# Altium PCB Boost2.PcbDoc
Units mil, origin at the board's own origin, x right, y up, seen from the top; angles counter-clockwise.
Board outline 5000 x 4000 mil, 2 copper layers (Top Layer, Bottom Layer); 25 components, 166 nets, 94 pads, 0 vias.
Unrouted connection lines stored in the file: 72.
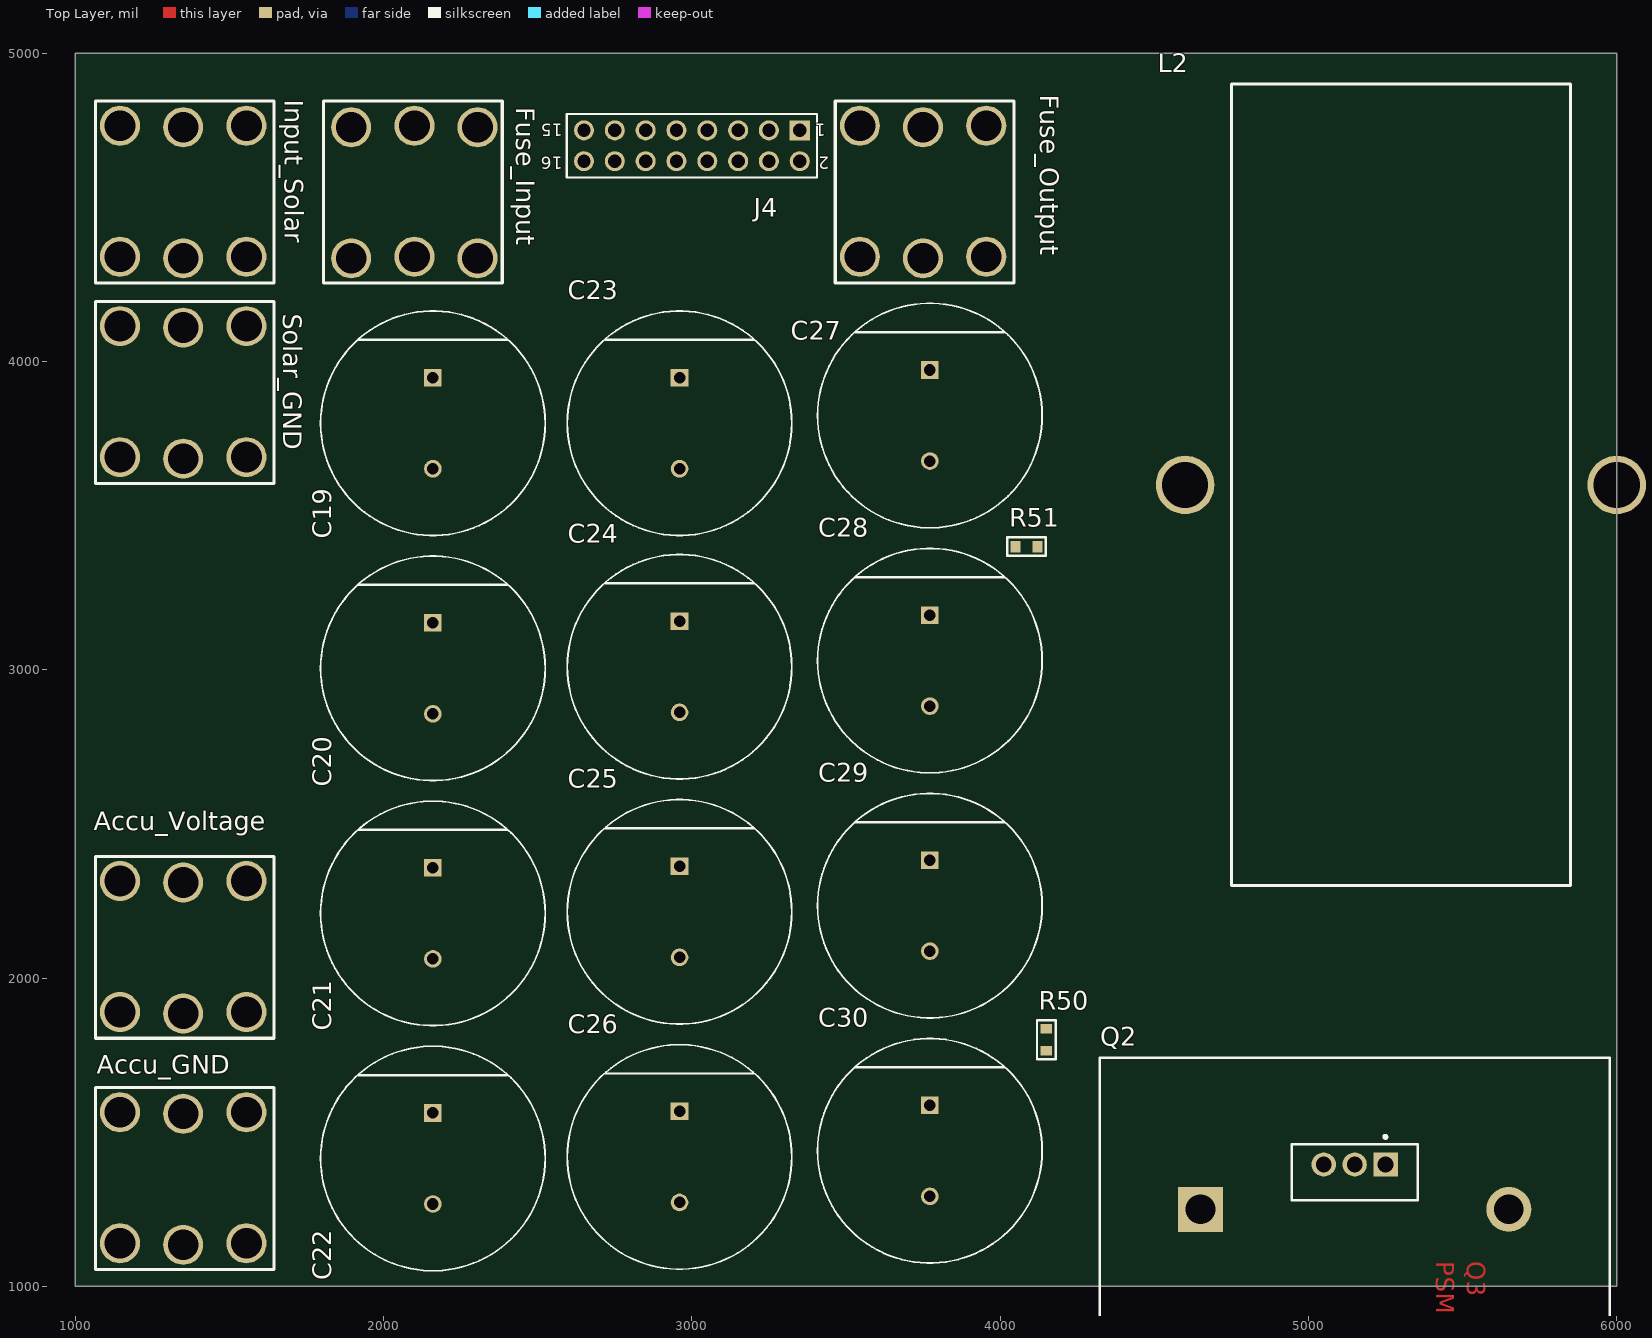
[diagram p0: Top Layer view]
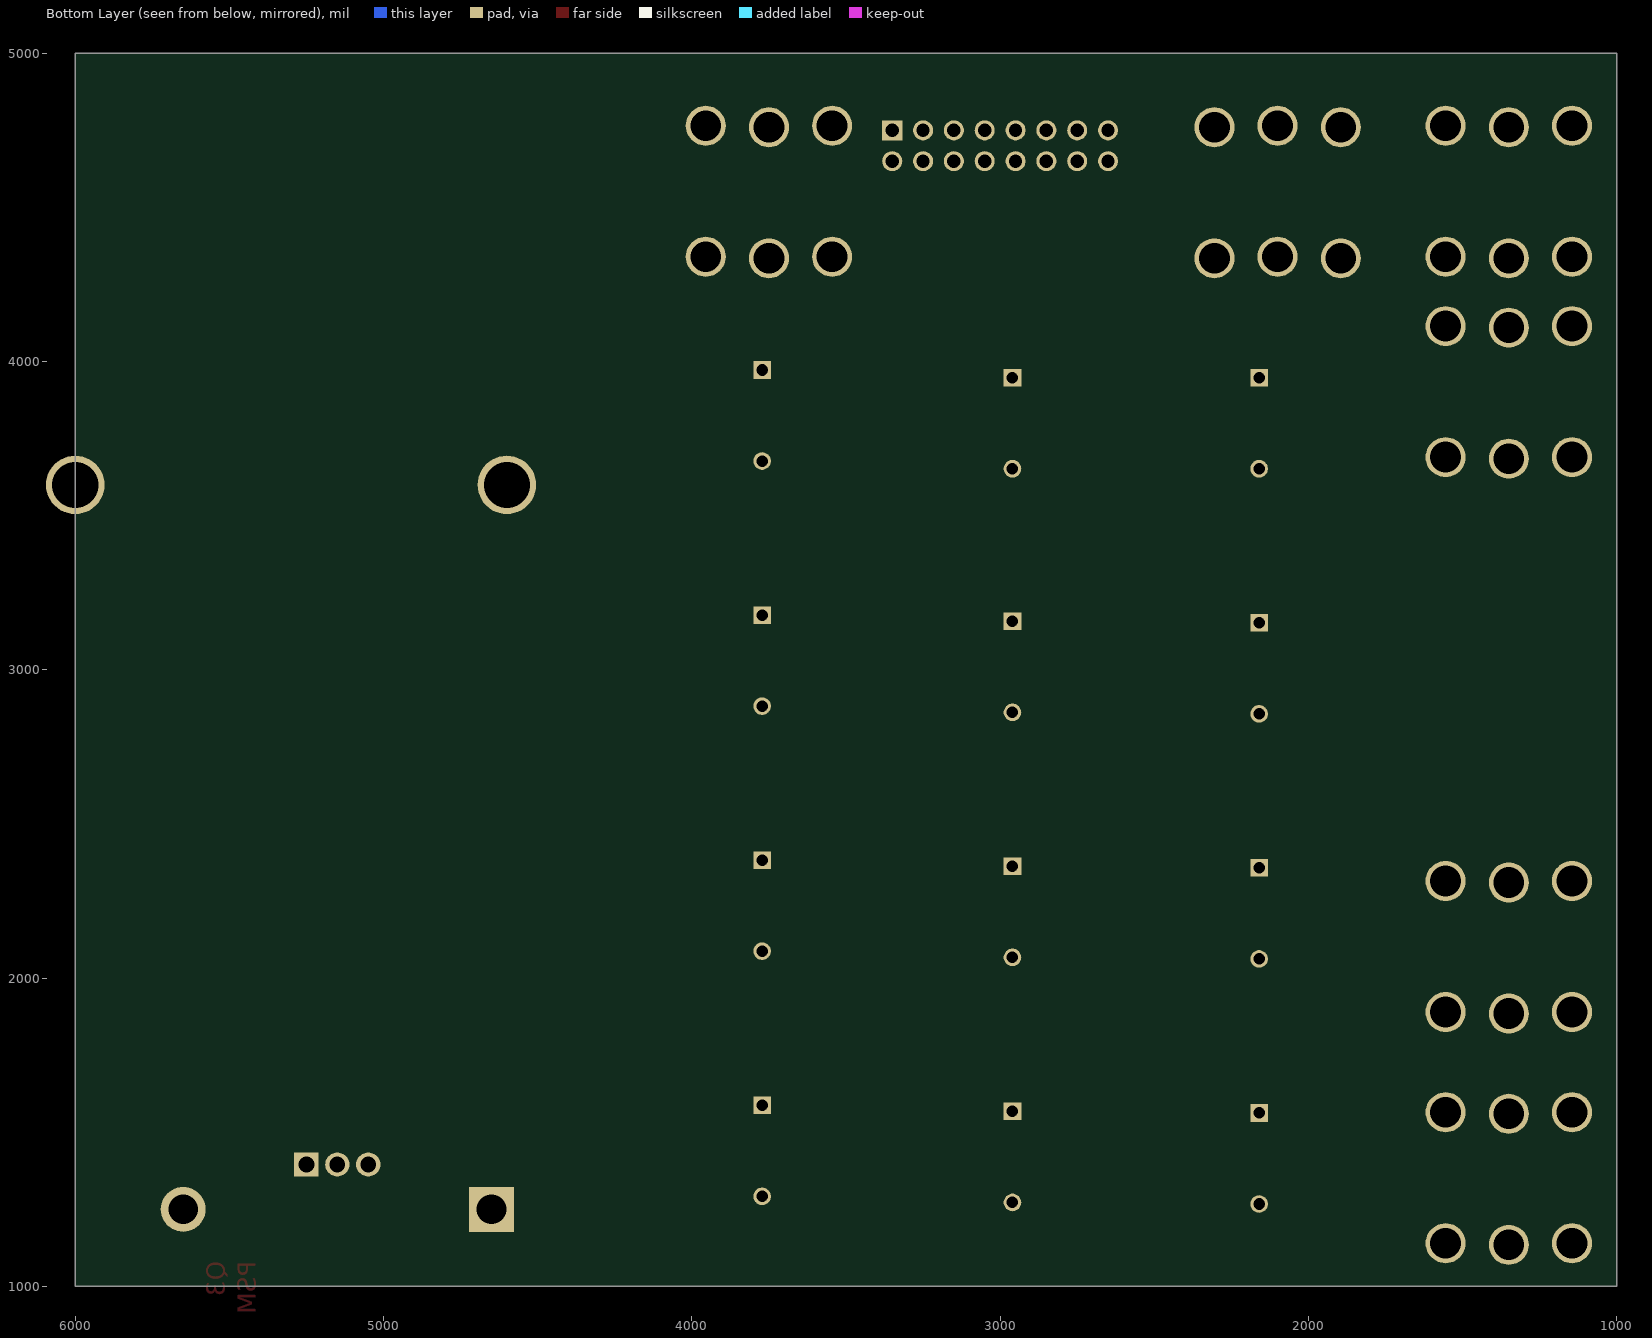
[diagram p1: Bottom Layer view, seen from below]

## Layer stack, top to bottom
Top Solder: solder mask 0.4, Solder Resist, Dk 3.5
Top Layer: signal copper 1.4
Dielectric 1: dielectric 12.6, FR-4, Dk 4.8
Bottom Layer: signal copper 1.4
Bottom Solder: solder mask 0.4, Solder Resist, Dk 3.5

## Board outline
1000,1000 6000,1000 6000,5000 1000,5000

## Design rules (kind name [scope] priority, off if disabled: settings)
Clearance [All] p1: gap=10 ignorepadtopadclearanceinfootprint=FALSE except(0: Arc-Hole Track-Hole SMDPad-Hole THPad-Hole Via-Hole Fill-Hole Poly-Hole Region-Hole Text-Hole)
PolygonConnect [All] p1: connectstyle=Relief reliefconductorwidth=10 reliefentries=4 polygonreliefangle="90 Angle" airgapwidth=10
RoomDefinition BoostConverter [InComponentClass('BoostConverter')] p1: confinementstyle=ConfineIn formatcopy=TRUE lockcomponents=FALSE outline 7045,1060 27110,1060 27110,3790 7045,3790
RoutingVias [All] p1: holewidth=28 width=50 viastyle="Through Hole" minholewidth=28 minwidth=50 maxholewidth=28 maxwidth=50
SolderMaskExpansion [All] p1: expansion=4 istentingtop=FALSE
Width [All] p1: maxlimit=10 minlimit=10 preferedwidth=10
30 further rules are at their usual default settings.

## Classes and differential pairs
component class BoostConverter: F1

## Components (designator, comment, footprint, x,y, rotation, side; value= is the part's Value field where it differs from the comment)
Accu_GND "Terminal_PCB" Terminal_PCB_7798 1350,1350 r90 top (schematic designator Accumulator_GND)
Accu_Voltage "Terminal_PCB" Terminal_PCB_7798 1350,2100 r90 top (schematic designator Accumulator_Voltage)
C19 "330 uF" FP-LXW18X25-MFG 2160,3800 r270 top
C20 "330 uF" FP-LXW18X25-MFG 2160,3005 r270 top
C21 "330 uF" FP-LXW18X25-MFG 2160,2210 r270 top
C22 "330 uF" FP-LXW18X25-MFG 2160,1415 r270 top
C23 "330 uF" FP-LXW18X25-MFG 2960,3800 r270 top
C24 "330 uF" FP-LXW18X25-MFG 2960,3010 r270 top
C25 "330 uF" FP-LXW18X25-MFG 2960,2215 r270 top
C26 "330 uF" FP-LXW18X25-MFG 2960,1420 r270 top
C27 "330 uF" FP-LXW18X25-MFG 3772.05,3825 r270 top
C28 "330 uF" FP-LXW18X25-MFG 3772.05,3030 r270 top
C29 "330 uF" FP-LXW18X25-MFG 3772.05,2235 r270 top
C30 "330 uF" FP-LXW18X25-MFG 3772.05,1440 r270 top
C44 "CAP_AC_68uF" Capacitor_AC_68_uF -99999,99999 r90 top
Fuse_Input "Terminal_PCB" Terminal_PCB_7798 2100,4550 r270 top
Fuse_Output "Terminal_PCB" Terminal_PCB_7798 3750,4550 r90 top
Input_Solar "Terminal_PCB" Terminal_PCB_7798 1350,4550 r90 top (schematic designator Input_Connector)
J4 "61301621121" 61301621121 3000,4700 r180 top
L2 "Coil" Tekercs_E65_FERRITE 5300,3600 r0 top value="50 uH"
Q2 "PSMN8R5-100PS" FP-TO-220AB-MFG 5150,1370 r270 top
Q3 "PSMN8R5-100PS" FP-TO-220AB-MFG 6930,834.65 r0 top
R50 "3.3K" FP_0603_RES 4150,1800 r90 top
R51 "3.3K" FP_0603_RES 4085.43,3400 r0 top
Solar_GND "Terminal_PCB" Terminal_PCB_7798 1350,3900 r90 top (schematic designator Input_Connector_GND)

## Footprints (in the part's own frame and the unit in brackets; to place one, negate y for a bottom-side part, rotate by r counter-clockwise, add the part's x,y. Pads: shape width x height; smd on the part's side, far side on the other; paste and mask are expansions set on the pad)
61301621121 [mm] "Pin Header, pitch 2.54 mm, THT, Vertical, dual row, 16p"
  rect 1.65x1.65 hole 1.1: 1(-8.89,-1.27)
  round 1.65 hole 1.1: 2(-8.89,1.27) 3(-6.35,-1.27) 4(-6.35,1.27) 5(-3.81,-1.27) 6(-3.81,1.27) 7(-1.27,-1.27) 8(-1.27,1.27) 9(1.27,-1.27) 10(1.27,1.27) 11(3.81,-1.27) 12(3.81,1.27) 13(6.35,-1.27) 14(6.35,1.27) 15(8.89,-1.27) 16(8.89,1.27)
  silkscreen extent -10.31,-2.62 10.31,2.62, body extent -10.16,-2.54 10.16,2.54, height 8.59
Capacitor_AC_68_uF [mil]
  round 55 hole 35: 1(-120503.27,-120503.27) 2(-119418.27,-120503.27)
  silkscreen extent -120581,-120933 -119341,-120073
FP-LXW18X25-MFG [mm]
  rect 1.45x1.45 hole 0.95 paste-1000 mask+0: 1(-3.75,0)
  round 1.45 hole 0.95 paste-1000 mask+0: 2(3.75,0)
  silkscreen extent -9.25,-9.25 9.25,9.25, body extent -9.35,-9.35 9.35,9.35, height 0.25
FP-TO-220AB-MFG [mm]
  rect 2x2 hole 1.3 paste-1000 mask+0: 1(-0.647,2.55)
  rect 3.7x3.7 hole 2.45 paste-1000 mask+0: 1(3.048,-12.7)
  round 2 hole 1.3 paste-1000 mask+0: 2(-0.647,0) 3(-0.647,-2.55)
  round 3.7 hole 2.45 paste-1000 mask+0: 2(3.048,12.7)
  Top Layer region: 12.816,-13.418 12.816,-13.418 12.816,-13.418 12.816,-13.418
  Top Layer region: 12.816,-13.418 12.816,-13.418 12.816,-13.418 12.816,-13.418
  Top Layer region: 12.816,-13.418 12.816,-13.418 12.816,-13.418 12.816,-13.418
  silkscreen extent -9.45,-21 15.55,21, body extent -9.55,-21.1 15.65,21.1, height 0.25
FP_0603_RES [mm] "0603 ellenállás"
  rect 0.8x0.95 smd: 1(-0.9,0) 2(0.9,0)
  silkscreen extent -1.6,-0.77 1.6,0.77, body extent -0.8,-0.4 0.8,0.4, height 0.44
Tekercs_E65_FERRITE [mil]
  round 190 hole 150: 1(-700,0) 2(700,0)
  silkscreen extent -550,-1300 550,1300
Terminal_PCB_7798 [mil]
  round 130 hole 100: 1(-215,0) 1(-210,-205) 1(-210,205) 1(210,0) 1(215,-205) 1(215,205)
  silkscreen extent -295,-295 295,285

## Part data
C19 C20 C21 C22 C23 C24 C25 C26 C27 C28 C29 C30: library part CMP-35376-000008-1, "CAP ALUM 47UF 20% 500V THRUHOLE / 500LXW47MEFR18X25"
C44: "Cap Film 68uF 100V PET 10% (31.5 X 22 X 36.5mm) Radial 27.5mm 125C Bulk", Capacitance=68uF, Case/Package=Radial, Dielectric=PET, Dielectric Material=Polyester, Manufacturer="TDK EPCOS", Manufacturer Part Number=B32524Q1686K000, Max Operating Temperature=125°C, Min Operating Temperature=-55°C, Tolerance=10%, Voltage Rating=100V, Category="Film Capacitors", ComponentLink1Description=http://www.farnell.com/datasheets/1955213.pdf?src-supplier=Farnell, ComponentLink1URL=http://www.farnell.com/datasheets/1955213.pdf?src-supplier=Farnell, ComponentLink2Description=http://components.arrow.com/part/dataview/0323_01924821?src-supplier=Arrow+Europe, ComponentLink2URL=http://components.arrow.com/part/dataview/0323_01924821?src-supplier=Arrow+Europe, ComponentLink3Description=https://www.tdk-electronics.tdk.com/inf/20/20/db/fc_2009/B32520_529.pdf?src-supplier=Digi-Key, ComponentLink3URL=https://www.tdk-electronics.tdk.com/inf/20/20/db/fc_2009/B32520_529.pdf?src-supplier=Digi-Key, ComponentLink4Description=http://www.farnell.com/datasheets/1955213.pdf?src-supplier=Element14, ComponentLink4URL=http://www.farnell.com/datasheets/1955213.pdf?src-supplier=Element14, Depth=22mm, Lead Diameter=0.8mm, Lead Pitch=27.5mm, Length=31.5mm, Packaging=Bulk, Pricing 1="1=16,57000, 10=15,74200, 50=13,25680, 100=12,42830, 500=11,01972, 1000=10,35688 (USD)", REACH SVHC="No SVHC", RoHS=Yes, RoHS Compliant=Yes, Stock 1=15, Supplier 1=Digi-Key, Voltage Rating (DC)=100V
J4: library part CMP-1502-01097-1, "THT Vertical Pin Header WR-PHD, Pitch 2.54 mm, Dual Row, 16 pins", Contact Resistance=20mOhm, Manufacturer="Wurth Elektronik", Operating Temperature=-40to105degC, Rated Current=3A, Withstanding Voltage=500VAC, Working Voltage=250VAC, Datasheet URL=https://katalog.we-online.de/em/datasheet/6130xx21121.pdf, Gender=Male, Manufacturer URL=http://www.we-online.de, Mounting Technology=THT, Orientation=Vertical, Package Reference=61301621121, Packaging=Bag, Part Number=61301621121, Pin Number=16, Pitch=2.54mm, Publisher=WurthElektronik, Row Number=Dual
L2: "50 uH", Category=Inductor
Q2 Q3: library part NMOS-2, "N-channel 100 V 8.5 mΩ standard level MOSFET in TO220", ComponentLink1Description="Manufacturer Link", ComponentLink1URL=http://www.irf.com/, DatasheetVersion=PD-9.814, LatestRevisionDate=17-Jul-2002, LatestRevisionNote="Re-released for DXP Platform.", Note="Pin 2 is electrically connected to pin 4.", PackageDescription="TO, Thru-Hole, Vertical, Heatsink Mounted; 3 In-Line Leads; Pitch 2.54 mm", PackageReference=TO-220AB, PackageVersion=Feb-1997, Published=8-Jun-2000, Publisher="Altium Limited"
R50 R51: library part RES, "Resistor"

## Nets (pads, with @x,y where several pads share a name; then routed paths per layer and width w, separated by ;. In a path a pad name is that pad's centre, name@x,y a point inside that pad or via, vN(x,y) a via of type N, cw(c..) or ccw(c..) an arc to the next point about the centre after c; other vN are vias at no path point)
0.19V: 
1.5625V: 
1V8: 
3.3V: 
3V3: 
5V: 
10V: 
/XRS: 
Accumulator_GND: Accu_GND.1 C19.1 C20.1 C21.1 C22.1 C23.1 C24.1 C25.1 C26.1 C27.1 C28.1 C29.1 C30.1 J4.7 J4.10 Q3.3 R51.2 Solar_GND.1
ADC_ACCU_DSP: 
ADC_CURR_BOOST: 
ADC_SOLAR_DSP: 
ADC_TEMP_B1: 
ADC_TEMP_B2: 
BDS: 
COMP: 
D+: 
D-: 
Fuse_Input: Fuse_Input.1 Input_Solar.1 J4.14 J4.16
Fuse_Output: Fuse_Output.1 L2.1
GDRV: 
NetAccu_Inv_Input_1: 
NetAccumulator_Voltage_1: Accu_Voltage.1 C19.2 C20.2 C21.2 C22.2 C23.2 C24.2 C25.2 C26.2 C27.2 C28.2 C29.2 C30.2 Q2.2
NetB2_3: 
NetC1_2: 
NetC3_1: 
NetC4_2: 
NetC5_2: 
NetC6_2: 
NetC7_2: 
NetC8_2: 
NetC9_2: 
NetC10_2: 
NetC11_2: J4.9
NetC12_2: J4.8
NetC13_2: 
NetC14_P: 
NetC18_1: 
NetC44_1: C44.1
NetC44_2: C44.2
NetC46_2: 
NetC50_1: 
NetC52_1: 
NetC52_2: 
NetC54_1: 
NetC56_1: 
NetC56_2: 
NetC58_1: 
NetC60_1: Q2.3 Q3.2 R50.1
NetC60_2: 
NetC65_1: 
NetC69_1: J4.2
NetC72_1: 
NetC72_2: 
NetC73_2: 
NetC74_2: 
NetD1_4: 
NetDS1_1: 
NetDS2_1: 
NetDS2_2: 
NetDS3_1: 
NetDS3_2: 
NetDS4_1: 
NetDS4_2: 
NetDS5_1: 
NetDS6_1: 
NetDS7_1: 
NetDS8_1: 
NetDS8_2: 
NetDS9_1: 
NetDS9_2: 
NetFB1_1: 
NetIC1_2: 
NetIC1_3: 
NetJ4_1: J4.1
NetJ4_3: J4.3
NetJ4_4: J4.4
NetJ4_5: J4.5
NetJ4_6: J4.6
NetJP1_1: 
NetK_COM: 
NetL2_2: L2.2
NetP2_3: 
NetP3_3: 
NetP3_4: 
NetP3_5: 
NetP3_6: 
NetP4_1: 
NetP4_2: 
NetP4_3: 
NetP4_4: 
NetP5_1: 
NetP5_2: 
NetP5_3: 
NetP5_4: 
NetP5_5: 
NetP5_6: 
NetQ1_3: 
NetQ2_1: Q2.1 R50.2
NetQ3_1: Q3.1 R51.1
NetQ4_1: 
NetQ5_1: 
NetQ6_1: 
NetQ7_1: 
NetQ8_2: 
NetQ9_2: 
NetQ10_2: 
NetQ11_2: 
NetR3_2: 
NetR4_2: 
NetR5_2: 
NetR6_2: 
NetR9_2: 
NetR10_1: 
NetR11_1: 
NetR12_1: 
NetR13_1: 
NetR14_1: 
NetR14_2: 
NetR15_1: 
NetR16_1: 
NetR17_1: 
NetR21_2: 
NetR22_1: 
NetR23_1: 
NetR24_1: 
NetR26_2: 
NetR27_2: 
NetR28_2: 
NetR29_2: 
NetR30_2: 
NetR31_2: 
NetR47_1: 
NetR48_1: 
NetR57_1: 
NetR66_1: 
NetR67_1: 
NetR68_1: 
NetR69_1: 
NetR70_1: 
NetR71_1: 
NetR72_1: 
NetR73_1: 
NetR73_2: 
NetR79_1: 
NetR90_1: 
NetR93_1: 
NetR95_2: 
NetR98_1: 
NetR99_1: 
NetT1_4: 
NetTP17_1: 
NetTP18_1: 
NetTP21_1: 
NetU1_40: 
PWM_BOOST_H: 
PWM_BOOST_L: 
Relay: 
RESET_USB: 
SHIELD: 
SI: 
SI_GND: 
TZ2: 
USB_5V: 
USB_5V_IN: 
VCCIO: 
pads on no net: J4.11 J4.12 J4.13 J4.15

## Text inside footprints (layer, text, board x,y; h text height)
J4: Top Overlay "16" at 2581.89,4664.57 h40 r180; Top Overlay "15" at 2581.89,4770.87 h40 r180; Top Overlay "1" at 3433.86,4770.87 h40 r180; Top Overlay "2" at 3445.67,4664.57 h40 r180
Q2: Top Layer "S" at 5395,478.91 h98.44 r270; Top Layer "P" at 5395,529.65 h98.44 r270; Top Layer "0" at 5395,574.05 h98.44 r270; Top Layer "0" at 5395,618.45 h98.44 r270; Top Layer "1" at 5395,662.85 h98.44 r270; Top Layer "-" at 5395,694.57 h98.44 r270; Top Layer "5" at 5395,738.97 h98.44 r270; Top Layer "R" at 5395,796.05 h98.44 r270; Top Layer "8" at 5395,840.45 h98.44 r270; Top Layer "N" at 5395,903.88 h98.44 r270; Top Layer "M" at 5395,980 h98.44 r270; Top Layer "S" at 5395,1030.74 h98.44 r270; Top Layer "P" at 5395,1081.49 h98.44 r270; Top Layer "3" at 5496.49,1018.06 h98.44 r270; Top Layer "Q" at 5496.49,1081.49 h98.44 r270
Q3: Top Layer "Q" at 7218.51,1181.13 h98.44; Top Layer "3" at 7281.94,1181.13 h98.44; Top Layer "P" at 7218.51,1079.65 h98.44; Top Layer "S" at 7269.26,1079.65 h98.44; Top Layer "M" at 7320,1079.65 h98.44; Top Layer "N" at 7396.12,1079.65 h98.44; Top Layer "8" at 7459.55,1079.65 h98.44; Top Layer "R" at 7503.95,1079.65 h98.44; Top Layer "5" at 7561.03,1079.65 h98.44; Top Layer "-" at 7605.43,1079.65 h98.44; Top Layer "1" at 7637.15,1079.65 h98.44; Top Layer "0" at 7681.55,1079.65 h98.44; Top Layer "0" at 7725.95,1079.65 h98.44; Top Layer "P" at 7770.35,1079.65 h98.44; Top Layer "S" at 7821.09,1079.65 h98.44